# Altium PCB WIRELESS_UART.PcbDoc
Units mil, origin at the board's own origin, x right, y up, seen from the top; angles counter-clockwise.
Board outline 3140.03 x 635.03 mil, 2 copper layers (Top Layer, Bottom Layer); 35 components, 21 nets, 112 pads, 36 vias.
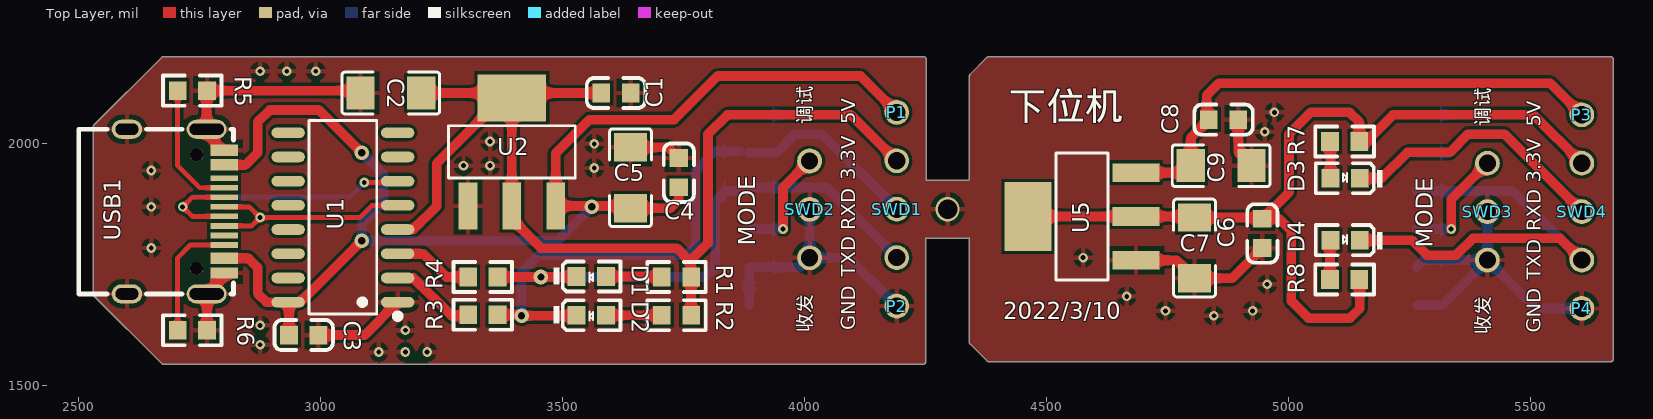
[diagram p0: Top Layer view]
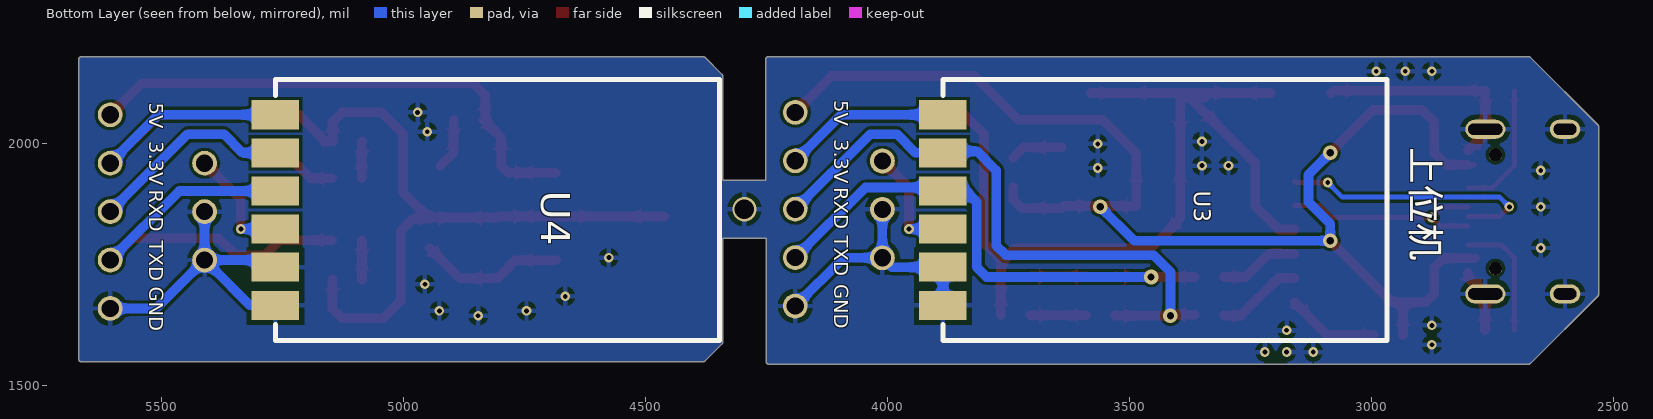
[diagram p1: Bottom Layer view, seen from below]

## Layer stack, top to bottom
Top Solder: solder mask 0.4, Solder Resist, Dk 3.5
Top Layer: signal copper 1.4
Dielectric 1: dielectric 12.6, FR-4, Dk 4.8
Bottom Layer: signal copper 1.4
Bottom Solder: solder mask 0.4, Solder Resist, Dk 3.5

## Board outline
2531.45,1686.45 2671.45,1546.45 2671.44,1546.47 ccw(c2675,1550) 2675,1544.98 4245,1544.99 ccw(c4245,1550) 4250.02,1550 4250.02,1804.59 4339.98,1804.59 4339.98,1590 ccw(c4345,1590) 4341.47,1586.44 4341.45,1586.45 4376.45,1551.45 4376.44,1551.47 ccw(c4380,1555) 4380,1549.98 5665,1549.98 ccw(c5665,1555) 5670.02,1555 5670.02,2174.61 ccw(c5665,2174.61) 5665,2179.62 4379.61,2179.62 ccw(c4379.61,2174.61) 4376.05,2178.14 4376.06,2178.15 4341.45,2143.55 4341.47,2143.56 ccw(c4345,2140) 4339.98,2140 4339.98,1925.02 4250.8,1925.02 4250.8,2175 ccw(c4245.78,2175) 4245.78,2180.02 2675,2180.01 ccw(c2675,2175) 2671.44,2178.53 2671.45,2178.55 2531.45,2038.55 2531.47,2038.56 ccw(c2535,2035) 2529.99,2035 2529.99,1690 ccw(c2535,1690) 2531.47,1686.44 2531.45,1686.45 cw(c2535,1690)

## Design rules (kind name [scope] priority, off if disabled: settings)
Clearance [All] p1: gap=6 ignorepadtopadclearanceinfootprint=TRUE
ComponentClearance [All] p1: gap=0 collisioncheckmode=3 verticalgap=0 showdistances=FALSE
PolygonConnect [All] p1: connectstyle=Relief reliefconductorwidth=10 reliefentries=4 polygonreliefangle="90 Angle" airgapwidth=10
RoutingVias [All] p1: holewidth=28 width=50 viastyle="Through Hole" minholewidth=28 minwidth=50 maxholewidth=28 maxwidth=50
SolderMaskExpansion [All] p1: expansion=4
Width [All] p1: maxlimit=200 minlimit=8 preferedwidth=20 minimp=50.000000 maximp=50.000000 favimp=50.000000
29 further rules are at their usual default settings.

## Components (designator, comment, footprint, x,y, rotation, side; value= is the part's Value field where it differs from the comment)
C1 "C_0603" C_0603 3610,2105 r0 top value=0.1uF
C2 "C_0603" "C1206 - duplicate" 3145,2105 r180 top value=10uF
C3 "C_0603" C_0603 2965,1605 r0 top value=0.1uF
C4 "C_0603" C_0603 3740,1940.55 r270 top value=0.1uF
C5 "C_0603" "C1206 - duplicate" 3640,1930 r270 top value=10uF
C6 "C_0603" C_0603 4945,1815 r270 top value=0.1uF
C7 "C_0603" "C1206 - duplicate" 4805,1785 r270 top value=10uF
C8 "C_0603" C_0603 4865,2050 r180 top value=0.1uF
C9 "C_0603" "C1206 - duplicate" 4860,1955 r180 top value=10uF
D1 "LED_0603" LED-0603 3560,1725 r180 top
D2 "LED_0603" LED-0603 3560,1645 r180 top
D3 "LED_0603" LED-0603 5115,1930 r0 top
D4 "LED_0603" LED-0603 5115,1802 r0 top
P1 "Header 1" HEADER1 4190,2065 r0 top
P2 "Header 1" HEADER1 4190,1665 r0 top
P3 "Header 1" HEADER1 5605,2060 r0 top
P4 "Header 1" HEADER1 5605,1660 r90 top
R1 "R_0603" R_0603 3735,1725 r180 top value=1K
R2 "R_0603" R_0603 3735,1646 r180 top value=1K
R3 "R_0603" R_0603 3335,1647 r180 top value=120
R4 "R_0603" R_0603 3335,1725 r180 top value=120
R5 "R_0603" R_0603 2735,2110 r180 top value=5.1K
R6 "R_0603" R_0603 2735,1615 r0 top value=5.1K
R7 "R_0603" R_0603 5115,2005 r180 top value=1K
R8 "R_0603" R_0603 5115,1720 r180 top value=1K
SWD1 "SWD" SH1_0X5P_WT 4190,1965 r270 top
SWD2 "SWD" SH1_0X5P_WT 4010,1964.61 r270 top
SWD3 "SWD4" SH1_0X5P_WT 5410,1760 r90 top
SWD4 "SWD" SH1_0X5P_WT 5605,1760 r90 top
U1 "CH340C" CH340C 3040,1825 r90 top
U2 "AMS1117-3.3_C369933" AMS1117 3392,2096 r270 top
U3 "JDY-41" 2.4GMODLE 3431.21,1860 r270 bottom
U4 "JDY-41" 2.4GMODLE 4810,1860 r270 bottom
U5 "AMS1117-3.3_C369933" AMS1117 4460,1847 r0 top
USB1 "TYPEC-304-BCP16" TYPE_C 2767.57,2030.16 r270 top

## Footprints (in the part's own frame and the unit in brackets; to place one, negate y for a bottom-side part, rotate by r counter-clockwise, add the part's x,y. Pads: shape width x height; smd on the part's side, far side on the other; paste and mask are expansions set on the pad)
2.4GMODLE [mil]
  rect 60x98.42 smd: 1(-200.17,-453.79) 2(-121.43,-453.79) 3(-42.69,-453.79) 4(36.05,-453.79) 5(114.79,-453.79) 6(193.53,-453.79)
  silkscreen extent -273,-454 266,464
AMS1117 [mm]
  rect 2.47x0.98 smd: 1(5.695,-2.224) 2(5.695,0.076) 3(5.695,2.376)
  rect 2.47x3.6 smd: 4(0.025,0.076)
  silkscreen extent 1.49,-3.25 4.23,3.4
"C1206 - duplicate" [mm]
  rect 1.485x1.728 smd: 1(-1.593,0) 2(1.593,0)
  silkscreen extent -2.56,-1.09 2.56,1.09
C_0603 [mm]
  rect 0.93x0.98 smd: 1(-0.77,0) 2(0.77,0)
  silkscreen extent -1.53,-0.79 1.54,0.79, body extent -0.8,-0.4 0.8,0.4, height 0.3
CH340C [mm]
  oval 0.56x1.745 smd: 1(-3.861,-3.027) 2(-2.591,-3.027) 3(-1.321,-3.027) 4(-0.051,-3.027) 5(1.219,-3.027) 6(2.489,-3.027) 7(3.759,-3.027) 8(5.029,-3.027) 9(5.029,2.718) 10(3.759,2.718) 11(2.489,2.718) 12(1.219,2.718) 13(-0.051,2.718) 14(-1.321,2.718) 15(-2.591,2.718) 16(-3.861,2.718)
  silkscreen extent -4.74,-3.18 5.66,1.62
HEADER1 [mm]
  round 1.3 hole 0.9: 1(0,0)
  body extent -1.26,-1.26 1.28,1.28, height 8.5
LED-0603 [mm]
  rect 0.93x0.98 smd: 1(-0.745,-0.025) 2(0.795,-0.025)
  silkscreen extent -1.51,-0.82 2,0.76, body extent -0.77,-0.43 0.83,0.37, height 0.6
R_0603 [mm]
  rect 0.93x0.98 smd: 1(-0.77,0) 2(0.77,0)
  silkscreen extent -1.53,-0.79 1.54,0.79, body extent -0.85,-0.4 0.85,0.4, height 0.56
SH1_0X5P_WT [mm]
  round 1.3 hole 0.9: 1(0,0) 2(2.54,0) 3(5.08,0)
  body extent -1.26,-1.26 6.36,1.28, height 8.5
TYPE_C [mm]
  oval 1x2.1 hole 0.6 slot 1.8 at 90 deg: 13(0,-0.076) 14(8.64,-0.076)
  oval 1x1.6 hole 0.6 slot 1.2 at 90 deg: 15(0,-4.256) 16(8.64,-4.256)
  rect 0.6x1.45 smd: A1B12(1.095,0.839) A4B9(1.87,0.839) B1A12(7.54,0.839) B4A9(6.77,0.839)
  rect 0.3x1.45 smd: A5(3.07,0.838) A6(4.07,0.839) A7(4.57,0.839) A8(5.57,0.839) B5(6.07,0.839) B6(5.07,0.839) B7(3.57,0.839) B8(2.57,0.839)
  round 0.7 hole 0.7 unplated: ""(1.34,-0.606) ""(7.3,-0.606)
  silkscreen extent 0,-6.79 8.64,1.34

## Part data
D1 D2 D3 D4: library part "LED 0603", "发光二极管", LatestRevisionDate=08-Jul-2005, LatestRevisionNote="Mech Layer 1 removed.", PackageDescription="LED; 2 Leads", PackageReference=LED-0, Published=8-Jun-2000, Publisher="Altium Limited"
SWD1 SWD2 SWD4: "SWD下载", LatestRevisionDate=17-Jul-2002, LatestRevisionNote="Re-released for DXP Platform.", Publisher="Altium Limited"
SWD3: library part SWD, "SWD下载", LatestRevisionDate=17-Jul-2002, LatestRevisionNote="Re-released for DXP Platform.", Publisher="Altium Limited"
U1: BOM_JLCPCB Part Class="Extended Part", BOM_Manufacturer=WCH, BOM_Manufacturer Part=CH340C, BOM_Supplier=LCSC, BOM_Supplier Part=C84681, spicePre=U, spiceSymbolName=CH340C
U2 U5: BOM_JLCPCB Part Class="Extended Part", BOM_Manufacturer=KEXIN, BOM_Manufacturer Part=AMS1117-3.3, BOM_Supplier=LCSC, BOM_Supplier Part=C369933, Contributor=LCSC, spicePre=U, spiceSymbolName=AMS1117-3.3_C369933
U3 U4: library part M-BK2461U, BOM_Manufacturer=DreamLNK(¿¥ê, BOM_Manufacturer Part=M-BK2461U, BOM_Supplier=LCSC, BOM_Supplier Part=C2837202, Contributor=LCSC, spicePre=U, spiceSymbolName=M-BK2461U
USB1: BOM_JLCPCB Part Class="Extended Part", BOM_Manufacturer=XUNPU, BOM_Manufacturer Part=TYPEC-304-BCP16, BOM_Supplier=LCSC, BOM_Supplier Part=C720629, Contributor=LCSC, spicePre=U, spiceSymbolName=TYPEC-304-BCP16
C1 C2 C3 C4 C5 C6 C7 C8 C9: LatestRevisionDate=17-Jul-2002, LatestRevisionNote="Re-released for DXP Platform.", PackageDescription="Radial Cap, Thru-Hole; 2 Leads; 0.3 in Pin Spacing", PackageReference=RAD-0.3, Published=8-Jun-2000, Publisher="Altium Limited"
P1 P2 P3 P4: LatestRevisionDate=17-Jul-2002, LatestRevisionNote="Re-released for DXP Platform.", Publisher="Altium Limited"
R1 R2 R3 R4 R5 R6 R7 R8: LatestRevisionDate=17-Jul-2002, LatestRevisionNote="Re-released for DXP Platform.", PackageDescription="Axial Device, Thru-Hole; 2 Leads; 0.4 in Pin Spacing", PackageReference=AXIAL-0.4, Published=8-Jun-2000, Publisher="Altium Limited"

## Via types
v1: diameter 20, hole 10, Top Layer to Bottom Layer, 30 vias
v2: diameter 30, hole 15, Top Layer to Bottom Layer, 5 vias
v3: diameter 50, hole 40, Top Layer to Bottom Layer, 1 vias

## Nets (pads, with @x,y where several pads share a name; then routed paths per layer and width w, separated by ;. In a path a pad name is that pad's centre, name@x,y a point inside that pad or via, vN(x,y) a via of type N, cw(c..) or ccw(c..) an arc to the next point about the centre after c; other vN are vias at no path point)
3.3V: C1.1 C2.1 R1.1 R2.1 SWD1.1 U1.4 U2.2 U2.4 U3.1 | length 2652.8
  Top Layer w20: U1.4 3191.23,1823 3240,1871.77 3240,1960 U2.4@3375,2095 ; C2.1 U2.4@3335,2105 ; C1.1 U2.4@3335,2105 ; R2.1 R1.1 3765.32,1755 ; SWD1.1 4095,2060 3840,2060 3800,2020 3800,1795 3765.32,1760.32 3765.32,1755 ; U2.4@3335,2105 3345,2095 U2.4@3375,2095 ; U2.4@3375,2095 U2.4 U2.2 3395,1844.68 3455,1784.68 3735.63,1784.68 3765.32,1755
  Bottom Layer w20: U3.1 4094.83,2060.17 SWD1.1
3.3V_1: C6.1 C7.1 R7.1 R8.1 SWD4.3 U4.1 U5.2 U5.4 | length 2242.1
  Top Layer w20: U5.4 U5.2 4802.7,1850 C7.1 4942.62,1847.7 C6.1 C6.1@4945.31,1845.32 ; R8.1 5146.31,1719 5146.31,1660 5126.31,1640 5040,1640 5005,1675 5005,1820 4979.69,1845.32 C6.1@4945.31,1845.32 ; SWD4.3 5505,2060 5215,2060 5160,2005 R7.1 5145.31,2045 5125.31,2065 5045,2065 5000,2020 5000,1900 C6.1@4945.31,1845.32
  Bottom Layer w20: U4.1 5504.83,2060.17 SWD4.3
5V: C3.1 C4.2 C5.2 P1.1 U1.16 U2.3 USB1.A4B9 USB1.B4A9 | length 2830.9
  Top Layer w10: USB1.A4B9@2786.54,1956.54 USB1.A4B9
  Top Layer w20: USB1.B4A9@2785.65,1763.62 USB1.B4A9 2851.38,1763.62 2870,1745 2870,1691.32 2888.32,1673 U1.16 ; USB1.A4B9 2845.11,1956.54 2870,1981.43 2870,2045 2895,2070 2996.43,2070 v2(3085,1981.43) ; C3.1 2934.68,1671.32 U1.16 ; v2(3085,1800) 2958,1673 U1.16 ; C4.2 3740,1885 3722.3,1867.3 C5.2 3635.53,1871.77 U2.3 3485.55,1980.55 3555,2050 3730,2050 3820,2140 4115,2140 P1.1
  Bottom Layer w20: v2(3085,1981.43) 3130,1936.43 3130,1880 3085,1835 v2(3085,1800) 3490,1800 v2(3560,1870)
5V_1: C8.2 C9.2 P3.1 U5.3 | length 1096.2
  Top Layer w20: U5.3 4782.85,1940.55 C9.2 4797.3,2012.62 C8.2@4830.21,2045.52 ; C8.2 C8.2@4830.21,2045.52 ; P3.1 5540,2125 4855,2125 4830.21,2100.21 C8.2@4830.21,2045.52
D+: U1.5 USB1.A6 USB1.B6 | length 459.8
  Top Layer w10: USB1.B6 2857.86,1830.55 v1(2875,1847.7) ; USB1.A6 2852.77,1869.92 v1(2875,1847.7) ; U1.5 3106.23,1873 3080.93,1847.7 v1(2875,1847.7)
D-: U1.6 USB1.A7 USB1.B7 | length 653.7
  Top Layer w10: USB1.A7 2734.69,1850.24 v1(2715,1869.92) 2734.68,1889.61 USB1.B7 ; v1(3090,1920) 3156.18,1920 U1.6
  Bottom Layer w10: v1(2715,1869.92) 2735.08,1890 3060,1890 v1(3090,1920)
GND: C1.2 C2.2 C3.2 C4.1 C5.1 C6.2 C7.2 C8.1 C9.1 P2.1 P4.1 R5.1 R6.2 SWD2.2 SWD2.3 SWD3.1 SWD3.2 U1.1 U2.1 U3.5 U3.6 U4.5 U4.6 U5.1 USB1.13 USB1.14 USB1.15 USB1.16 USB1.A1B12 USB1.B1A12 | length 2507.6
  Top Layer w20: R6.2 2765.32,1689.25 USB1.14 2800.59,1726.02 USB1.B1A12 ; USB1.A1B12 2797.95,1987.05 2764.57,2020.43 USB1.13 2764.57,2109.26 R5.1 3077.3,2110 C2.2 ; C3.2 3091.18,1605 U1.1 ; C5.1 3718.17,1992.7 C4.1 ; U5.1 4767.85,1759.45 C7.2 4882.62,1722.3 C6.2 ; C8.1 4895.31,1982.38 C9.1
  Bottom Layer w10: USB1.16 USB1.16@2620,1690
  Bottom Layer w20: U3.6 U3.5 3990.6,1745.2 SWD2.3 ; SWD2.2 SWD2.3 ; P2.1 4090.39,1764.61 SWD2.3 ; U4.6 5316.47,1666.46 SWD3.1@5395.2,1745.2 ; U4.5 5278.58,1760 SWD3.1 ; SWD3.2 SWD3.1 ; P4.1 5510,1660 SWD3.1
  other v1: 3120,1570 3175,1570 3220,1570 2875,1585 3175,1615 2875,1625 4845,1645 4745,1655 4925,1655 4665,1685 4955,1710 4575,1765 2650,1785 2650,1869.92 2650,1945 3565,1950 3295,1955 3350,1955 3565,2000 3350,2005 4950,2025 4970,2065 2875,2150 2930,2150 2990,2150
  other v3: 4295,1865
NetD1_1: D1.1 R1.2 | length 115.8
  Top Layer w20: D1.1 3703.69,1726 R1.2
NetD2_1: D2.1 R2.2 | length 115.4
  Top Layer w20: D2.1 R2.2
NetD3_1: D3.1 R7.2 | length 76.4
  Top Layer w20: R7.2 5085.68,2004 D3.1
NetD4_1: D4.1 R8.2 | length 81.4
  Top Layer w20: R8.2 5084.68,1800 D4.1
NetR3_2: R3.2 U1.2 | length 178.6
  Top Layer w20: U1.2 3192,1723 3270,1645 3302.68,1645 R3.2
NetR4_2: R4.2 U1.3 | length 165.4
  Top Layer w20: U1.3 3212,1773 3260,1725 R4.2
NetR5_2: R5.2 USB1.A5 | length 269.8
  Top Layer w10: R5.2 2704.68,1955 2750.39,1909.29 USB1.A5
NetR6_1: R6.1 USB1.B5 | length 256.5
  Top Layer w10: R6.1 2704.69,1764.61 2731.26,1791.18 USB1.B5
RXD: D1.2 R4.1 SWD1.3 U3.3 | length 1114.6
  Top Layer w20: R4.1 v2(3455,1725) 3527.69,1725 D1.2
  Bottom Layer w20: v2(3455,1725) 3795,1725 3815,1745 3815,1880 3837.69,1902.69 U3.3 3892.31,1910 4045,1910 SWD1.3
RXD1: D3.2 SWD4.2 U4.2 | length 986.1
  Top Layer w20: D3.2 5191.62,1929 5245,1982.38 5332.38,1982.38 5370,2020 5445,2020 SWD4.2
  Bottom Layer w20: U4.2 5331.43,1981.43 5370,2020 5445,2020 SWD4.2
SET: SWD2.1 U3.4 | length 233.4
  Top Layer w20: v1(3955,1823.95) 3955,1909.61 SWD2.1
  Bottom Layer w20: U3.4 v1(3955,1823.95)
SET1: SWD3.3 U4.4 | length 238.3
  Top Layer w20: v1(5335,1823.95) 5335,1885 SWD3.3
  Bottom Layer w20: U4.4 v1(5335,1823.95)
TXD: D2.2 R3.1 SWD1.2 U3.2 | length 1295.6
  Top Layer w20: R3.1 3423,1647 v2@3421,1645 ; v2(3415,1645) v2@3421,1645 ; D2.2@3527.69,1647 D2.2 3527.69,1645 v2@3421,1645
  Bottom Layer w20: v2(3415,1645) 3415,1735 3450,1770 3755,1770 3775,1790 3775,1945 3815,1985 U3.2@3865,1985 ; U3.2 3941.43,1981.43 3980,2020 4035,2020 SWD1.2
TXD1: D4.2 SWD4.1 U4.3 | length 905
  Top Layer w20: D4.2 5254,1801 5285,1770 5345,1770 5380,1805 5560,1805 SWD4.1
  Bottom Layer w20: U4.3 5462.31,1902.69 SWD4.1
pads on no net: U1.7 U1.8 U1.9 U1.10 U1.11 U1.12 U1.13 U1.14 U1.15 USB1. USB1.A8 USB1.B8

## Polygon pours and split planes (outlines as drawn)
GND on Bottom Layer "Top Layer-No Net" (solid, remove dead copper, pour order 12): 2531.45,1686.45 2671.45,1546.45 2671.44,1546.47 ccw(c2675,1550) 2675,1544.98 4245,1544.99 ccw(c4245,1550) 4250.02,1550 4250.02,1804.59 4339.98,1804.59 4339.98,1590 ccw(c4345,1590) 4341.47,1586.44 4341.45,1586.45 4376.45,1551.45 4376.44,1551.47 ccw(c4380,1555) 4380,1549.98 5665,1549.98 ccw(c5665,1555) 5670.02,1555 5670.02,2174.61 ccw(c5665,2174.61) 5665,2179.62 4379.61,2179.62 ccw(c4379.61,2174.61) 4376.05,2178.14 4376.06,2178.15 4341.45,2143.55 4341.47,2143.56 ccw(c4345,2140) 4339.98,2140 4339.98,1925.02 4250.8,1925.02 4250.8,2175 ccw(c4245.78,2175) 4245.78,2180.02 2675,2180.01 ccw(c2675,2175) 2671.44,2178.53 2671.45,2178.55 2531.45,2038.55 2531.47,2038.56 ccw(c2535,2035) 2529.99,2035 2529.99,1690 ccw(c2535,1690) 2531.47,1686.44 2531.45,1686.45 cw(c2531.45,1686.45)
GND on Top Layer "GND_L01_P013" (solid, remove dead copper, pour order 13): 2531.45,1686.45 2671.45,1546.45 2671.44,1546.47 ccw(c2675,1550) 2675,1544.98 4245,1544.99 ccw(c4245,1550) 4250.02,1550 4250.02,1804.59 4339.98,1804.59 4339.98,1590 ccw(c4345,1590) 4341.47,1586.44 4341.45,1586.45 4376.45,1551.45 4376.44,1551.47 ccw(c4380,1555) 4380,1549.98 5665,1549.98 ccw(c5665,1555) 5670.02,1555 5670.02,2174.61 ccw(c5665,2174.61) 5665,2179.62 4379.61,2179.62 ccw(c4379.61,2174.61) 4376.05,2178.14 4376.06,2178.15 4341.45,2143.55 4341.47,2143.56 ccw(c4345,2140) 4339.98,2140 4339.98,1925.02 4250.8,1925.02 4250.8,2175 ccw(c4245.78,2175) 4245.78,2180.02 2675,2180.01 ccw(c2675,2175) 2671.44,2178.53 2671.45,2178.55 2531.45,2038.55 2531.47,2038.56 ccw(c2535,2035) 2529.99,2035 2529.99,1690 ccw(c2535,1690) 2531.47,1686.44 2531.45,1686.45 cw(c2531.45,1686.45)

## Silkscreen, mask and mechanical layers (free items; w line width, h text height)
Top Overlay:
  text "调试" at 4025,2039.9 h50 r90
  text "5V" at 4115,2040 h50 r90
  text "调试" at 5425,2035.29 h50 r90
  text "5V" at 5530,2035 h50 r90
  text "下位机" at 4420,2030.16 h100
  text "3.3V" at 4115,1924.8 h50 r90
  text "3.3V" at 5530,1919.8 h50 r90
  text "RXD" at 4115,1821.46 h50 r90
  text "RXD" at 5530,1820 h50 r90
  text "MODE" at 3910,1790 h60 r90
  text "MODE" at 5310,1785.39 h60 r90
  text "TXD" at 4115,1725 h50 r90
  text "TXD" at 5530,1719.05 h50 r90
  text "2022/3/10" at 4410,1625 h60
  text "GND" at 4115,1614.9 h50 r90
  text "收发" at 4025,1609.9 h50 r90
  text "GND" at 5530,1609.9 h50 r90
  text "收发" at 5425,1605.29 h50 r90
Bottom Overlay:
  text "5V" at 4120,2090 h50 r90
  text "5V" at 5535,2085 h50 r90
  text "3.3V" at 4120,2010 h50 r90
  text "3.3V" at 5535,2005 h50 r90
  text "上位机" at 2935,1995 h100 r90
  text "RXD" at 4120,1910 h50 r90
  text "RXD" at 5535,1905 h50 r90
  text "TXD" at 4120,1810 h50 r90
  text "TXD" at 5535,1800 h50 r90
  text "GND" at 4120,1709.9 h50 r90
  text "GND" at 5535,1704.9 h50 r90
Mechanical 13:
  lines w10: 2535,1690 2675,1550 ; 2535,1690 2675,1550 ; 2535,1690 2535,2035 2675,2175 4245.78,2175 4245.78,1920 4345,1920 4345,2140 4379.61,2174.61 5665,2174.61 5665,1555 5445,1555 4380,1555 4345,1590 4345,1810 4344.61,1809.61 4245,1809.61 4245,1550 2675,1550